# EAGLE board PracticumBoard (EAGLE 9.6.2)
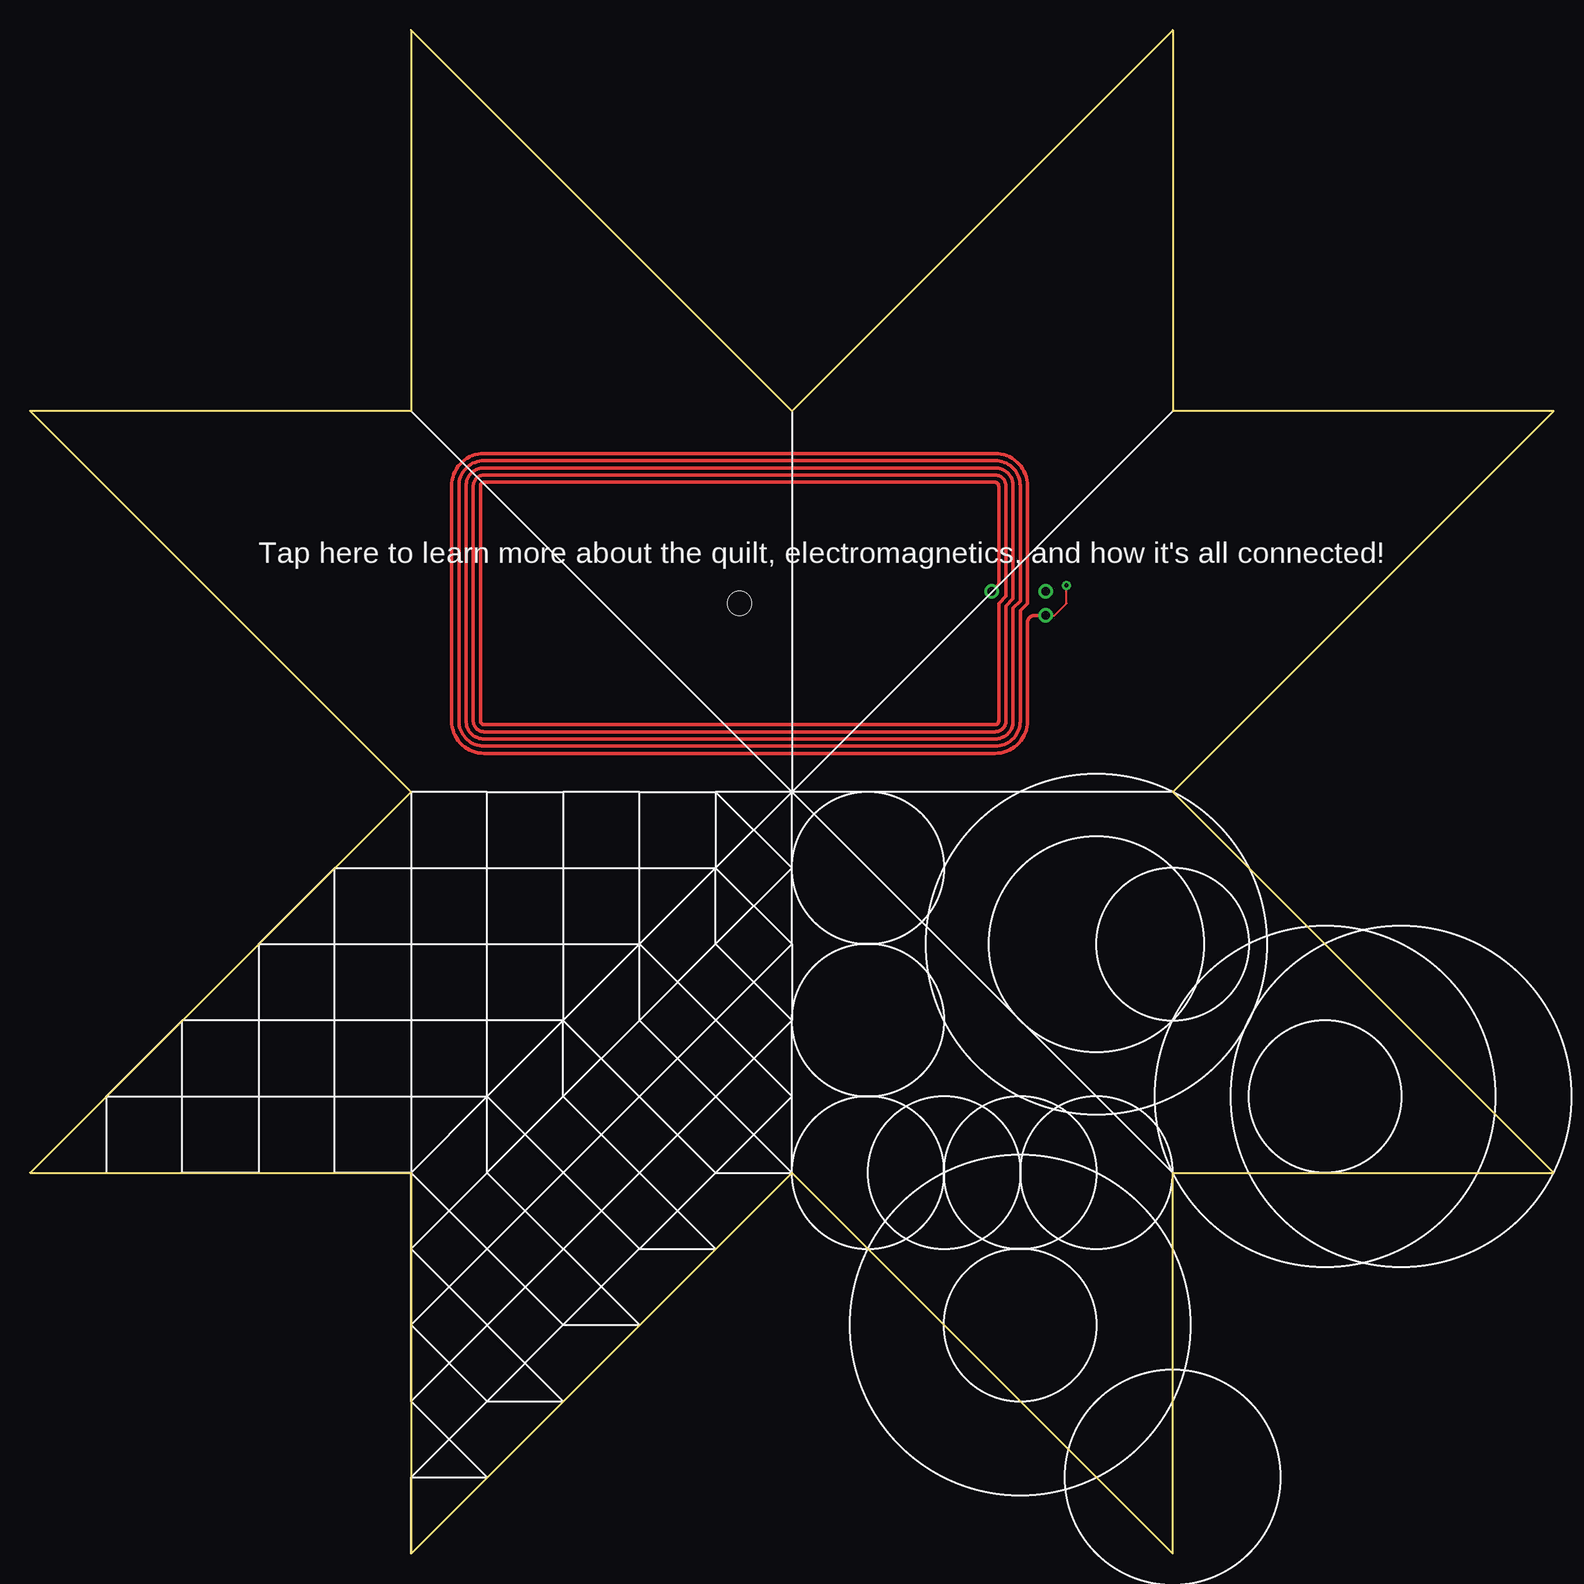
[diagram p0: board, top side]
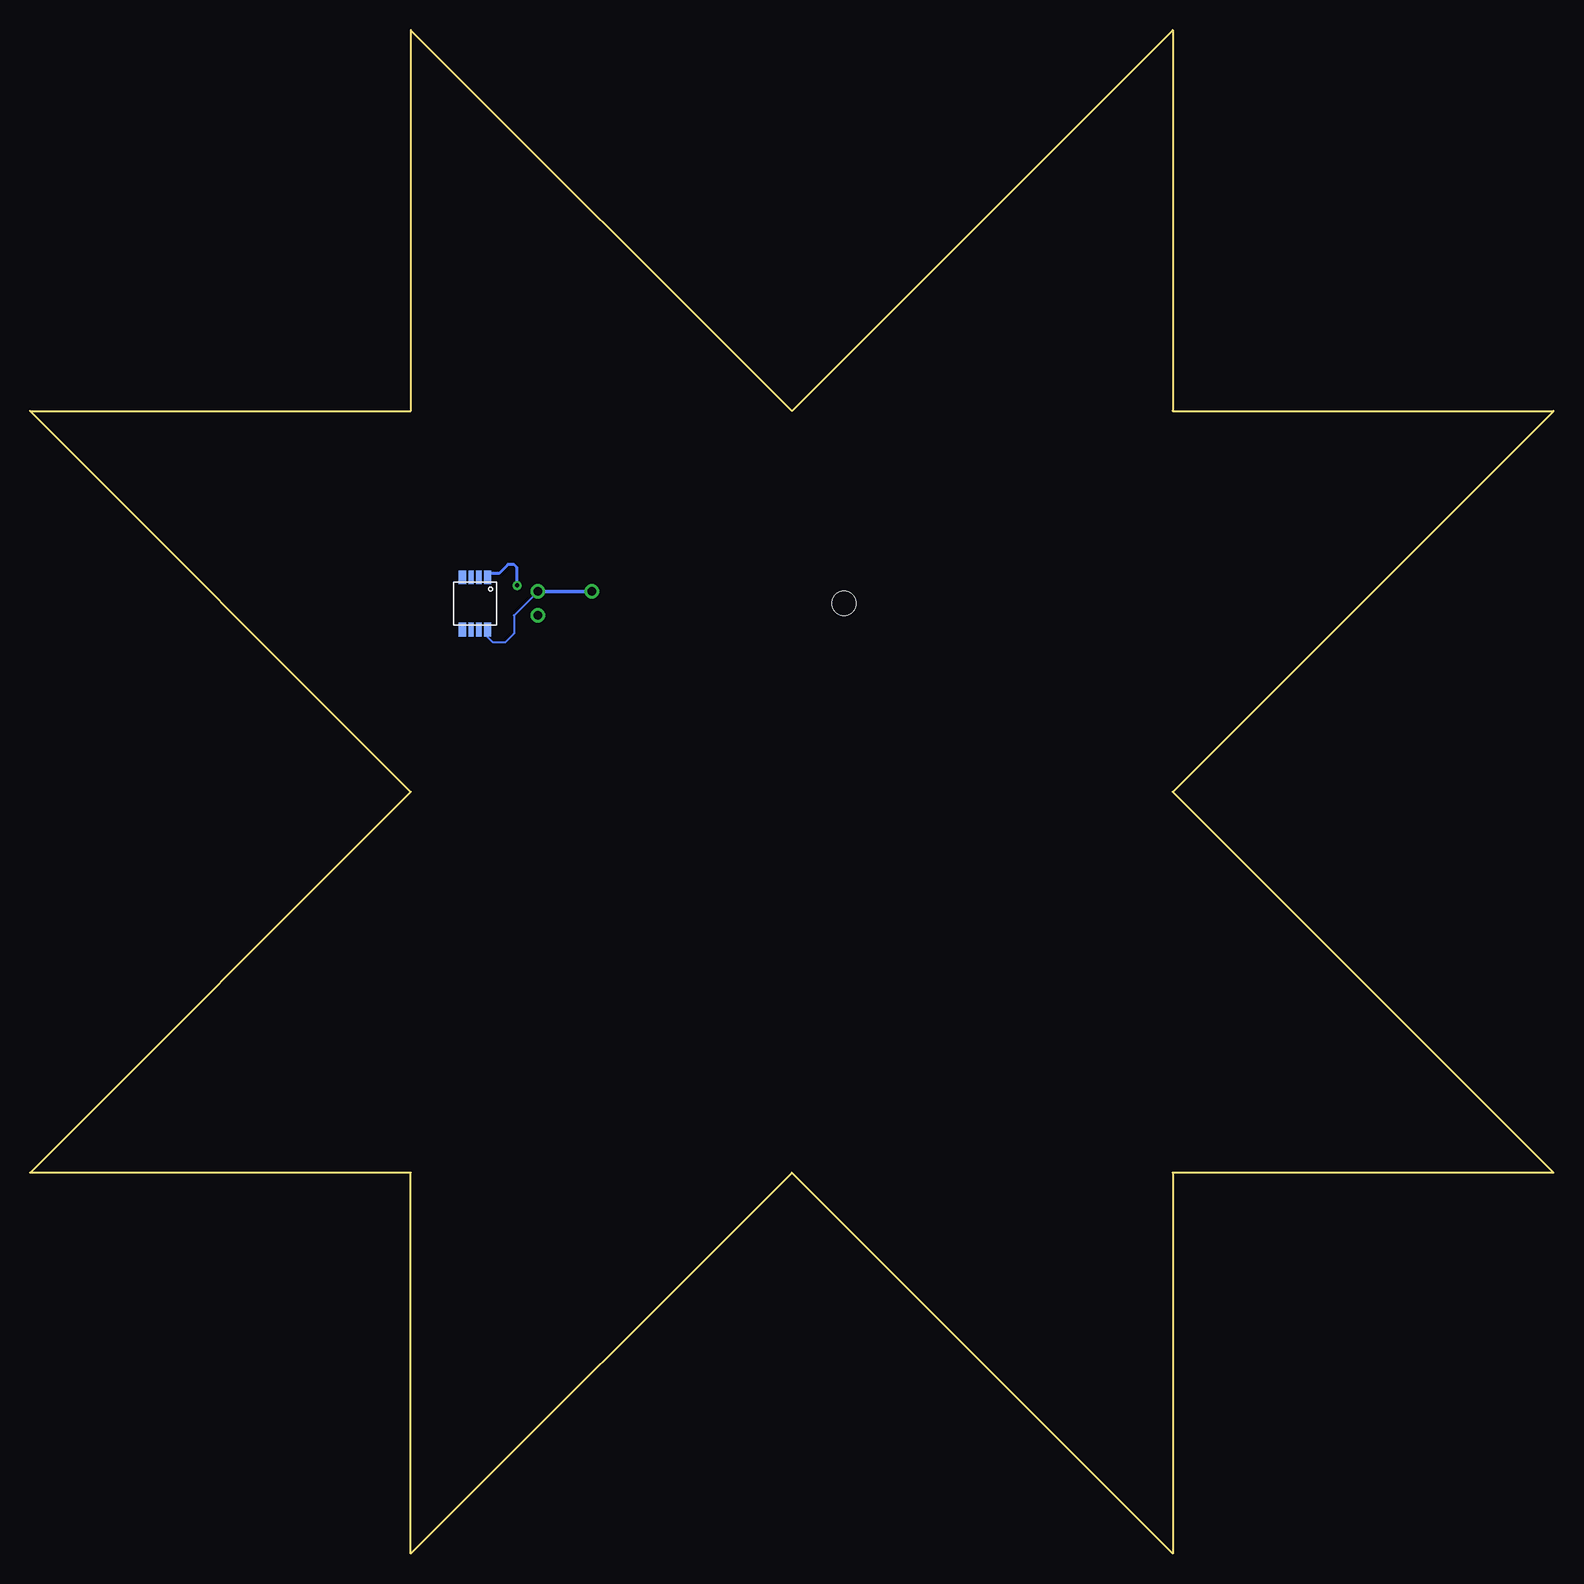
[diagram p1: board, bottom side, seen from below]

Size 127 x 127 mm. Coordinates in mm from the lower left corner, seen from the top.
Outline: 63.5,95.25 95.25,127 95.25,95.25 127,95.25 95.25,63.5 127,31.75 95.25,31.75 95.25,0 63.5,31.75 31.75,0 31.75,31.75 0,31.75 31.75,63.5 0,95.25 31.75,95.25 31.75,127 63.5,95.25
Copper layers (1*16): Top 0.035mm / dielectric 1.5mm / Bottom 0.035mm
Design rules "default": minimum track width 10mil, minimum drill 24mil, track to track 8mil, track to pad 8mil, pad to pad 8mil, via to via 8mil, smd to smd 8mil, copper to edge 40mil, drill to drill 8mil, minimum pad ring 10mil, minimum via ring 8mil, stop-mask expansion 4mil, vias tented up to drill 0mil, thermal gap 10mil

## Footprints (pad centres in the part's own frame; a part is rotated, then mirrored left to right if it is on the bottom)
L_PICC_CLASS4_50PF_01 = drill 0.7: P$1 25.5,1; P$2 25.5,-1; P$3 21,1 | hole 2: 0,0
NFC_CHIP = smd 0.6 x 1.15: FD 1.05,-2.175; LA -1.05,-2.175; LB -1.05,2.175; SDA 1.05,2.175 | smd 0.45 x 1.15: SCL 0.325,-2.175; VCC 0.325,2.175; VOUT -0.325,2.175; VSS -0.325,-2.175

## Placement (x,y rotation side)
E$1  [L_PICC_CLASS4_50PF_01]  59.15,79.2 0 top
E$2  [NFC_CHIP]  89.9,79.2 180 bottom

## Library data of the parts
E$1 = NXP_PICC_Antennas
E$2 = SOP65P490X110-8N (1)

## Nets
S$1: E$1.P$2

## Tracks (layer width: path | path; a pad name or v marks a point on that pad's centre or on a via)
S$1  (via drill 0.35)
  Top 0.152: E$1.P$2 85.4,78.2 86.4,79.2 v86.4,80.7
  Bottom 0.254: v86.4,80.7 86.4,82.2 86.65,82.45 87.15,82.45 87.9,81.7 88.9,81.7
S$2
  Bottom 0.152: 84.9,80.2 84.9,79.95 86.65,78.2 86.65,76.7 87.4,75.95 88.4,75.95 88.9,76.45 88.9,76.95

## Text on the board
tPlace: Tap here to learn more about the quilt, electromagnetics, and how it's all connected!